# Altium PCB DC_5_3.3.PcbDoc
Units mil, origin at the board's own origin, x right, y up, seen from the top; angles counter-clockwise.
Board outline 6000 x 4000 mil, 2 copper layers (Top Layer, Bottom Layer); 27 components, 10 nets, 75 pads, 0 vias.
Unrouted connection lines stored in the file: 2.
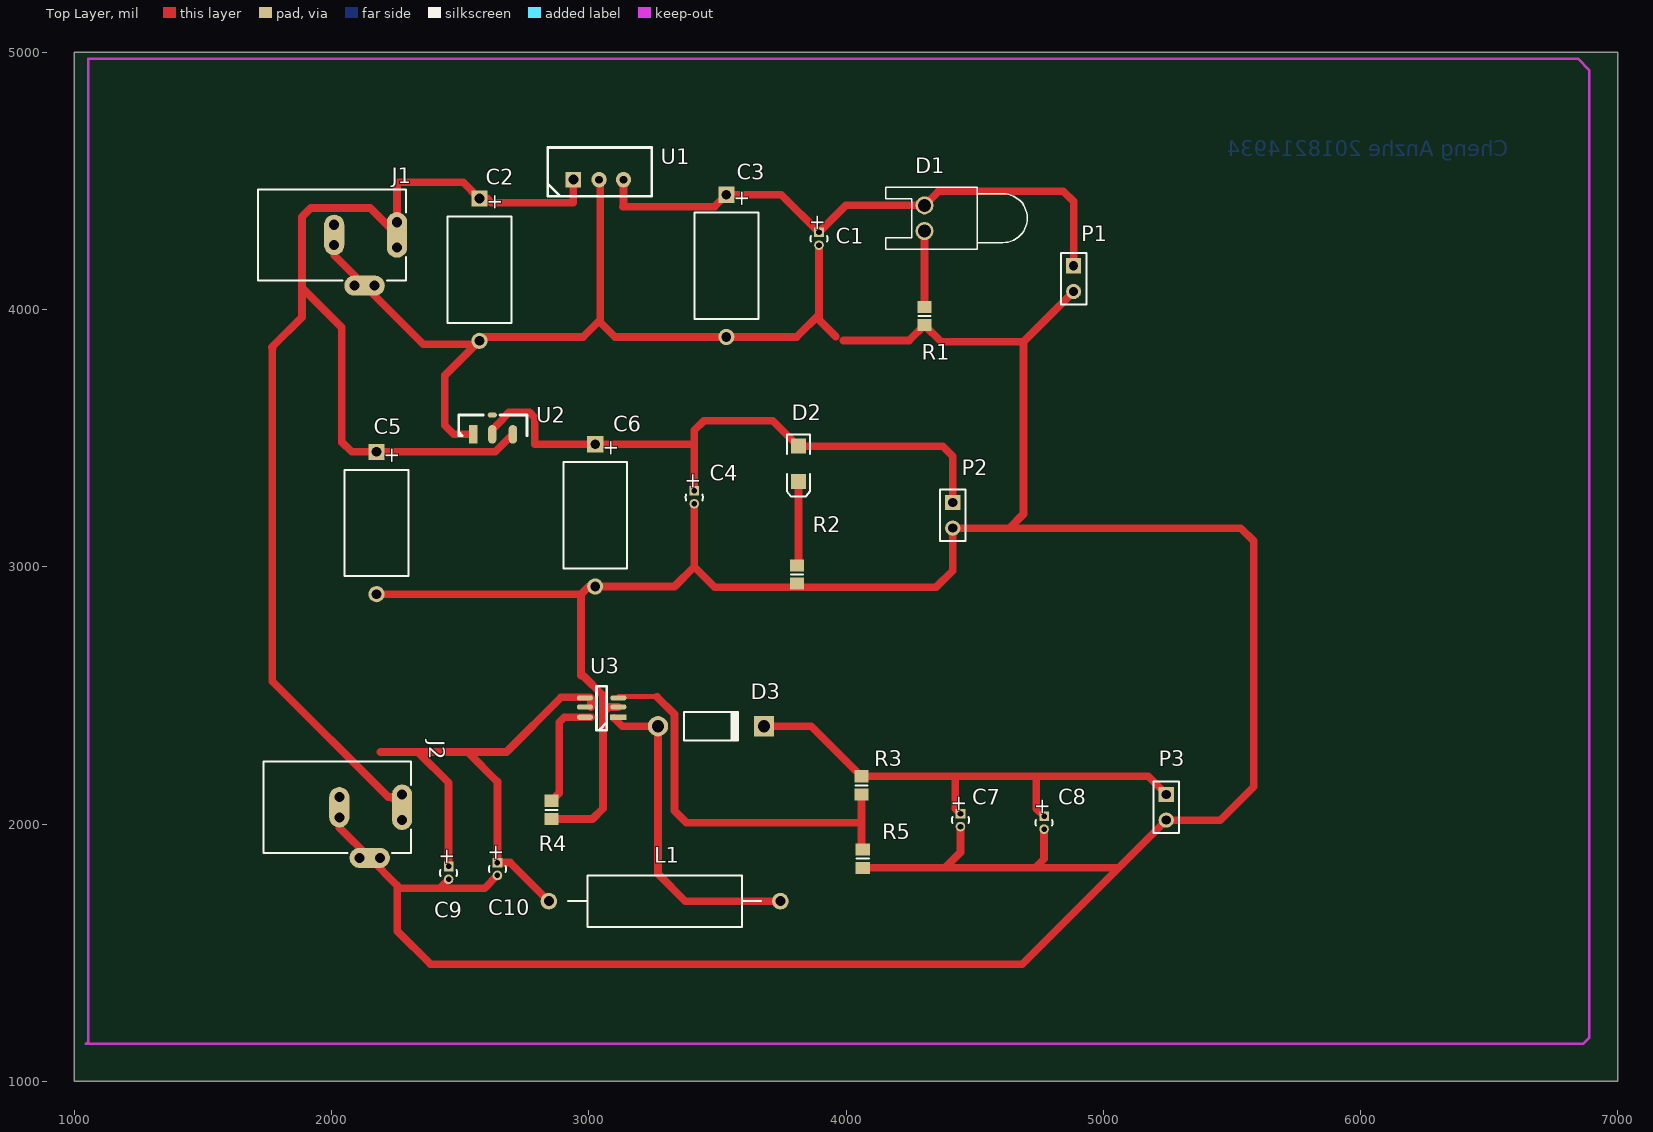
[diagram p0: Top Layer view]
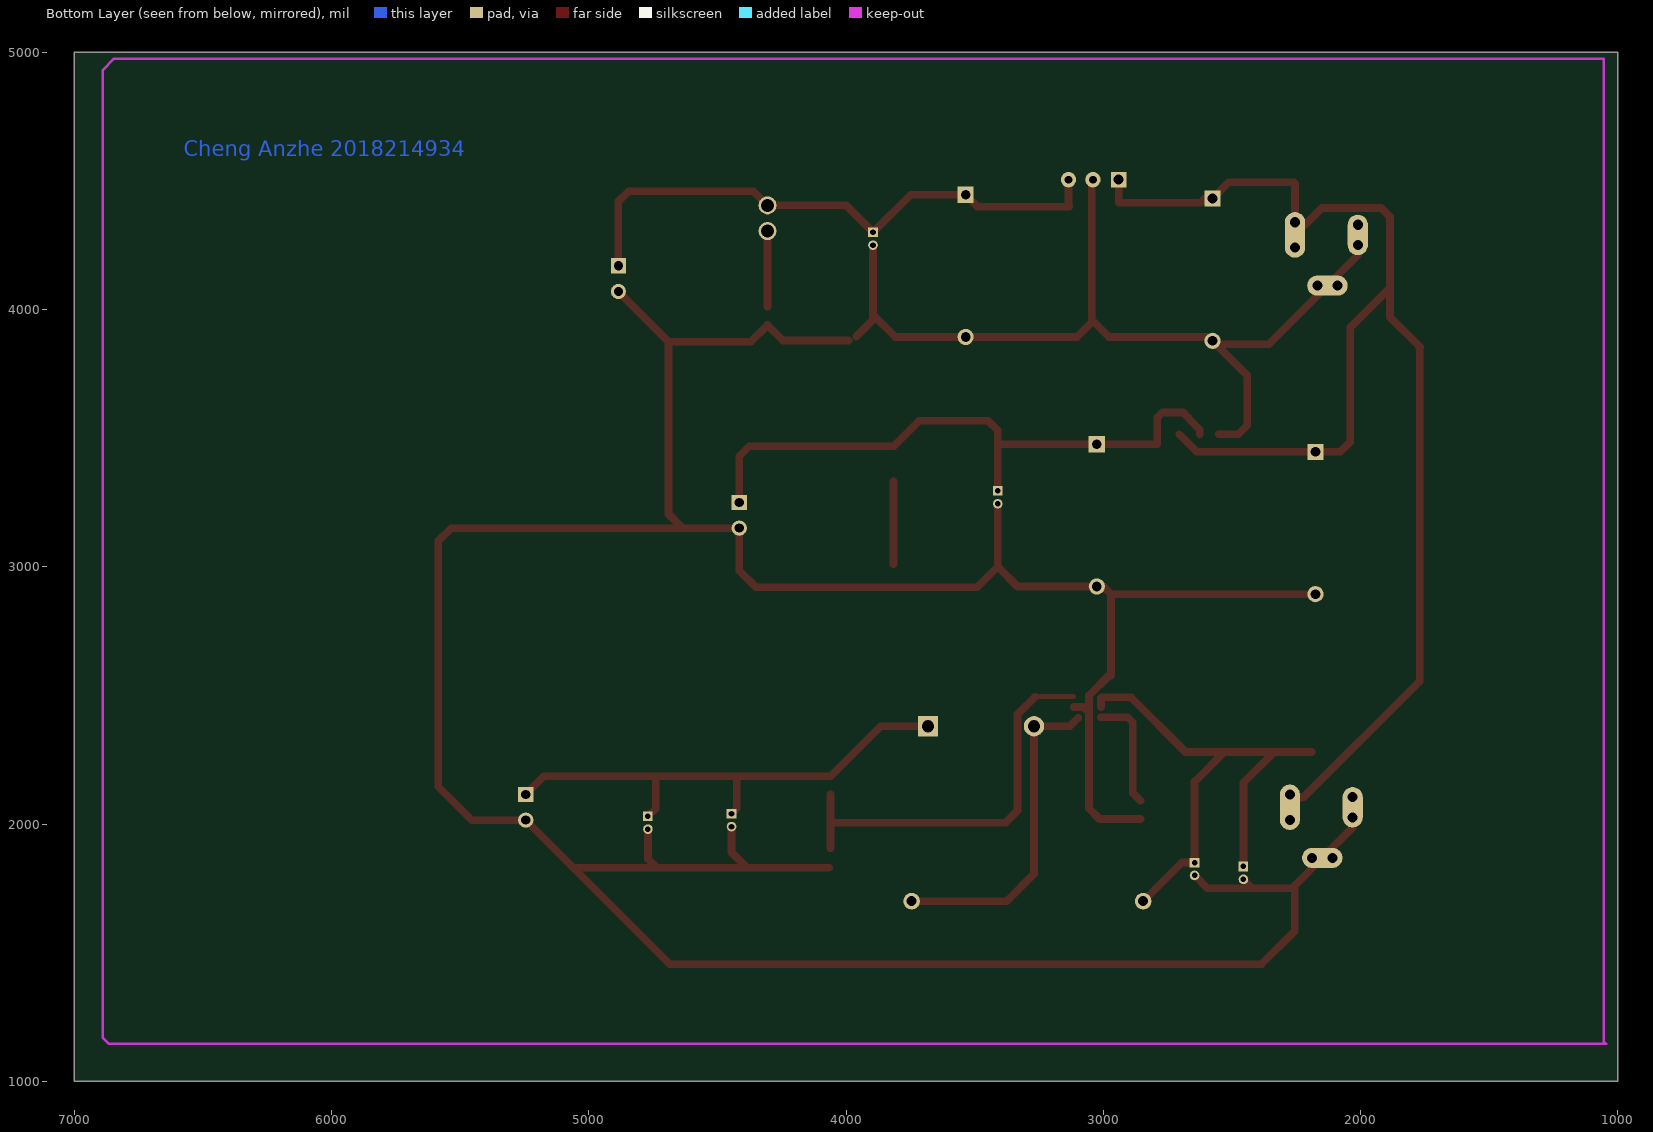
[diagram p1: Bottom Layer view, seen from below]

## Layer stack, top to bottom
Top Solder: solder mask 0.4, Solder Resist, Dk 3.5
Top Layer: signal copper 1.4
Dielectric 1: dielectric 12.6, FR-4, Dk 4.8
Bottom Layer: signal copper 1.4
Bottom Solder: solder mask 0.4, Solder Resist, Dk 3.5

## Board outline
1000,1000 7000,1000 7000,5000 1000,5000

## Design rules (kind name [scope] priority, off if disabled: settings)
Clearance [All] p1: gap=10
PolygonConnect [All] p1: connectstyle=Relief reliefconductorwidth=10 reliefentries=4 polygonreliefangle="90 Angle" airgapwidth=10
RoutingVias [All] p1: holewidth=28 width=50 viastyle="Through Hole" minholewidth=28 minwidth=50 maxholewidth=28 maxwidth=50
SolderMaskExpansion [All] p1: expansion=4
Width [All] p1: maxlimit=100 minlimit=10 preferedwidth=30
29 further rules are at their usual default settings.

## Components (designator, comment, footprint, x,y, rotation, side; value= is the part's Value field where it differs from the comment)
C1 "Comment" CAPPR1.27-1.7x2.8 3895,4275 r270 top
C2 "Comment" CAPPA14.05-10.5x6.3 2575,4155 r270 top
C3 "Comment" CAPPA14.05-10.5x6.3 3535,4170 r270 top
C4 "Cap Pol1" CAPPR1.27-1.7x2.8 3410,3270 r270 top
C5 "Cap Pol2" CAPPA14.05-10.5x6.3 2175,3170 r270 top
C6 "Cap Pol2" CAPPA14.05-10.5x6.3 3025,3200 r270 top
C7 "Cap Pol1" CAPPR1.27-1.7x2.8 4445,2015 r270 top
C8 "Cap Pol1" CAPPR1.27-1.7x2.8 4770,2005 r270 top
C9 "Cap Pol1" CAPPR1.27-1.7x2.8 2455,1810 r270 top
C10 "Cap Pol1" CAPPR1.27-1.7x2.8 2645,1825 r270 top
D1 "Comment" LED-0 4305,4355 r90 top
D2 "LED2" DSO-F2/D6.1 3815,3400 r270 top
D3 "Diode 11DQ03" DIO10.46-5.3x2.8 3475,2380 r0 top
J1 "Comment" KLD-0202 1715,4290 r0 top
J2 "PWR2.5" KLD-0202 1735,2065 r0 top
L1 "Inductor Iron" AXIAL-0.9 3295,1700 r0 top
P1 "Header 1" HDR1X2 4885,4170 r270 top
P2 "Header 3" HDR1X2 4415,3250 r270 top
P3 "Header 2" HDR1X2 5245,2115 r270 top
R1 "Comment" "RES 0805N (2012)" 4305,3975 r90 top
R2 "150Ω" "RES 0805N (2012)" 3810,2970 r90 top
R3 "88kΩ" "RES 0805N (2012)" 4060,2150 r90 top
R4 "1kΩ" "RES 0805N (2012)" 2855,2055 r90 top
R5 "12kΩ" "RES 0805N (2012)" 4065,1865 r90 top
U1 "MC7805CT" TO-220-3 3325,2715 r0 top
U2 "Comment" SOT-223 2545,3625 r0 top
U3 "FP6291" SOT23-6 3095,2415 r90 top

## Footprints (in the part's own frame and the unit in brackets; to place one, negate y for a bottom-side part, rotate by r counter-clockwise, add the part's x,y. Pads: shape width x height; smd on the part's side, far side on the other; paste and mask are expansions set on the pad)
AXIAL-0.9 [mm] "Axial Device, Thru-Hole; 2 Leads; 0.9 in Pin Spacing"
  round 1.65 hole 1: 1(-11.43,0) 2(11.43,0)
  silkscreen extent -9.53,-2.54 9.53,2.54
CAPPA14.05-10.5x6.3 [mm] "Capacitor, Axial, Polarised; Body 10.5 x 6.3 mm (LxDia. max), Lead Dia. 0.6 mm (typ)"
  rect 1.6x1.6 hole 0.95: 1(-7.025,0)
  round 1.6 hole 0.95: 2(7.025,0)
  silkscreen extent -5.25,-3.15 5.25,3.15
CAPPR1.27-1.7x2.8 [mm] "Capacitor, Radial, Tantalum; Body 1.7 x 2.8 mm (Dia.xH max); Pin Spacing 1.27 mm (typ)"
  rect 0.95x0.95 hole 0.55: 1(-0.635,0)
  round 0.95 hole 0.55: 2(0.635,0)
  silkscreen extent -0.29,-0.85 0.29,0.85
DIO10.46-5.3x2.8 [mm] "Diode, Axial; Body 5.2 x 2.7 mm (LxDia. max), Lead Dia. 0.86 mm (max)"
  round 2 hole 1.2: 1(-5.23,0)
  rect 2x2 hole 1.2: 2(5.23,0)
  silkscreen extent -2.65,-1.41 2.75,1.4
DSO-F2/D6.1 [mm] "SMT LED; 2 Flat Leads"
  rect 1.5x1.5 smd: 1(-1.75,0) 2(1.75,0)
  silkscreen extent -2.9,-1.15 3.2,1.15
HDR1X2 [mm] "Connector; Header; 2 Position"
  rect 1.5x1.5 hole 0.9: 1(0,0)
  round 1.5 hole 0.9: 2(2.54,0)
  silkscreen extent -1.27,-1.27 3.81,1.27
KLD-0202 [mm] "DC Power Jack, 2.5mm, KLD Series, PCB Mount"
  oval 2x4.5 all layers, no hole: 1(13.7,0)
  round 1.5 hole 1: 1A(13.7,-1.25) 1B(13.7,1.25) 2A(7.5,-1) 2B(7.5,1) 3A(9.5,-5) 3B(11.5,-5)
  oval 2x4 all layers, no hole: 2(7.5,0)
  oval 4x2 all layers, no hole: 3(10.5,-5)
  silkscreen extent 0,-4.5 14.6,4.5
LED-0 [mil] "Typical INFRARED GaAs LED; 2 Leads"
  round 70 hole 50: 1(50,0) 2(-50,0)
  silkscreen extent -120,-400 120,150
"RES 0805N (2012)" [mm] "Chip Resistor, Body 2.0x1.2mm, IPC Medium Density"
  rect 1.2x1.4 smd: 1(-0.9,0) 2(0.9,0)
  silkscreen extent 0,-0.6 0,0.6, body extent -1,-0.62 1,0.63, height 0.55
SOT23-6 [mm]
  rect 0.5x1.6 smd: 1(0,-0.508)
  oval 0.5x1.6 smd: 2(1.016,-0.508) 3(1.905,-0.508) 4(1.905,2.794) 5(1.016,2.794) 6(0,2.794)
  silkscreen extent -1.27,0.63 3.05,1.65
SOT-223 [mil]
  rect 33x72.36 smd: 1(5,-110)
  oval 33x72.36 smd: 2(80,-110) 3(160,-110)
  oval 35.83x19.68 smd: 4(80,-35)
  silkscreen extent -50,-116 215,-35
TO-220-3 [mil]
  rect 60x60 hole 39.37: 1(-385,1790)
  round 60 hole 30: 2(-285,1790) 3(-190,1790)
  silkscreen extent -485,1725 -80,1915

## Part data
C1: library part "Cap Pol1", "Polarized Capacitor (Radial)"
C2 C3: library part "Cap Pol2", "Polarized Capacitor (Axial)"
C4 C7 C8 C9 C10: "Polarized Capacitor (Radial)"
C5 C6: "Polarized Capacitor (Axial)"
D1: library part LED2, "Typical RED, GREEN, YELLOW, AMBER GaAs LED"
D2: "Typical RED, GREEN, YELLOW, AMBER GaAs LED"
D3: "Schottky Rectifier"
J1: library part PWR2.5, "Low Voltage Power Supply Connector"
J2: "Low Voltage Power Supply Connector"
L1: "Magnetic-Core Inductor"
P1 P2: library part "Header 2", "Header, 2-Pin"
P3: "Header, 2-Pin"
R1 R2 R3 R4 R5: library part Res2, "Resistor"
U2: library part AMS117-3.3, "AMS117-3.3"

## Nets (pads, with @x,y where several pads share a name; then routed paths per layer and width w, separated by ;. In a path a pad name is that pad's centre, name@x,y a point inside that pad or via, vN(x,y) a via of type N, cw(c..) or ccw(c..) an arc to the next point about the centre after c; other vN are vias at no path point)
GND: C1.2 C2.2 C3.2 C4.2 C5.2 C6.2 C7.2 C8.2 C9.2 C10.2 J1.2 J1.2A J1.2B J1.3 J1.3A J1.3B J2.2 J2.2A J2.2B J2.3 J2.3A J2.3B P1.2 P2.2 P3.2 R1.1 R2.1 R4.1 R5.1 U1.2 U2.1 U3.2 | length 17505.5
  Top Layer w10: C2.2@2561.57,3865 C2.2 C2.2@2590,3893.43 ; U1.2 U1.2@3045,4500
  Top Layer w30: J1.2 J1.2A 2010.28,4211.26 J1.3 2356.54,3865 2561.57,3865 2440,3743.43 2440,3550 2475,3515 U2.1 ; J2.2 J2.2A 2030.28,1986.26 J2.3 2255.91,1760.63 2255.91,1740 ; C5.2@2185,2893.43 2970,2893.43 ; C9.2 2420,1750 ; C2.2@2590,3893.43 2978.43,3893.43 3035,3950 3045,3950 ; C10.2 2595,1750 2420,1750 ; R4.1 3014.57,2019.57 3055,2060 3055,2432.01 ; U1.2@3045,4500 3045,3950 ; U3.2 3077.99,2455 3055,2432.01 ; C4.2 3410,3000 ; C1.2 3895,3980 ; 3960,3895 3895,3960 3895,3980 ; 3990,3880 4245.43,3880 R1.1 4369.57,3875 4690,3875 ; R5.1 4385,1829.57 ; C7.2 4445,1889.57 4385,1829.57 ; C8.2 4770,1864.57 4735,1829.57 ; P1.2 4690,3875 ; 2255.91,1740 2255.91,1584.09 2385,1455 4685,1455 5059.57,1829.57 ; 2255.91,1740 2265.91,1750 2420,1750 ; 2970,2893.43 3000,2923.43 C6.2 3333.43,2923.43 3410,3000 ; 2970,2893.43 2970,2577.4 2977.6,2577.4 3055,2500 3055,2432.01 ; 3045,3950 3101.57,3893.43 C3.2 3808.43,3893.43 3895,3980 ; 3410,3000 3490,2920 4350,2920 4415,2985 P2.2 4635,3150 ; 4385,1829.57 4735,1829.57 ; 4635,3150 5535,3150 5585,3100 5585,2145 5455,2015 P3.2 5059.57,1829.57 ; 4635,3150 4690,3205 4690,3875 ; 4735,1829.57 5059.57,1829.57
NetC1_1: C1.1 C3.1 D1.1 P1.1 U1.3 | length 2260.8
  Top Layer w30: 3131.57,4400 3490,4400 ; 3135,4405 U1.3 ; 3493.43,4405 C3.1 3748.43,4446.57 C1.1 4000,4405 D1.1 4360,4460 4845,4460 4885,4420 P1.1
NetC4_1: C4.1 C6.1 D2.1 P2.1 U2.2 | length 2425.1
  Top Layer w30: U2.2 2625,3532.65 2667.91,3575.57 2667.91,3577.91 2690,3600 2770,3600 2790,3580 2790,3476.57 C6.1 3398.43,3476.57 ; C4.1 3410,3530 3448.15,3568.15 3715.75,3568.15 D2.1 4376.1,3468.9 4415,3430 P2.1
NetC7_1: C7.1 C8.1 D3.2 P3.1 R3.2 | length 1995.4
  Top Layer w30: D3.2 3865.43,2380 R3.2 4425,2185.43 ; C7.1 4425,2060 4425,2185.43 ; C8.1 4740,2060 4740,2185.43 ; P3.1 5174.57,2185.43 4740,2185.43 ; 4425,2185.43 4740,2185.43
NetD1_2: D1.2 R1.2 | length 294.6
  Top Layer w30: R1.2 D1.2
NetD2_2: D2.2 R2.2 | length 320.7
  Top Layer w30: R2.2@3815,3010.43 D2.2
NetD3_1: D3.1 L1.2 U3.1 | length 1278.9
  Top Layer w30: U3.1@3097.51,2412.49 3130,2380 D3.1 3269.09,1805.91 3375,1700 L1.2
NetR3_1: R3.1 R5.2 U3.3 | length 1576.8
  Top Layer w20: U3.3@3115,2495 3265,2495
  Top Layer w30: 3265,2495 3333.46,2426.54 3333.46,2051.54 3380,2005 4060,2005 ; R5.2@4060,1905.43 4060,2005 ; R3.1 4060,2005
NetR4_2: R4.2 U3.6 | length 448.7
  Top Layer w30: R4.2 2885,2120.43 2885,2395 2905,2415 U3.6@3008.39,2415
VCC: C2.1 C5.1 C9.1 C10.1 J1.1 J1.1A J1.1B J2.1 J2.1A J2.1B L1.1 U1.1 U2.3 U3.4 U3.5 | length 7557.6
  Top Layer w10: 1768.29,3853.29 1780,3841.57 ; C2.1 C2.1@2605,4431.57
  Top Layer w30: 1768.29,3853.29 1885,3970 1885,4085 2040,3930 2040,3485 2078.43,3446.57 C5.1 2636.57,3446.57 U2.3 ; 1770.79,3850.79 1770,3850 1770,2555 2220,2105 2234.37,2105 J2.1 ; 1885,4090 1885,4360 1920,4395 2149.37,4395 J1.1 J1.1B 2254.37,4489.37 2259.37,4494.37 2512.2,4494.37 C2.1 ; 2190,2280 2335,2280 ; C9.1 2455,2160 2335,2280 ; C2.1@2605,4431.57 2621.57,4415 2940,4415 U1.1 ; L1.1 2695,1850 C10.1 2645,2165 2530,2280 ; U3.5@3008.39,2455 3008.39,2489.8 3005.79,2492.4 2892.4,2492.4 2680,2280 2530,2280 ; 2335,2280 2530,2280
pads on no net: U2.4

## Keep-outs
Keep-Out Layer:
  lines w10: 1045,1145 1055,1155 1055,4975 6845,4975 6890,4930 6890,1170 6865,1145 1045,1145

## Other copper
Bottom Layer:
  text "Cheng Anzhe 2018214934" at 6575,4595 h60

## Text inside footprints (layer, text, board x,y; h text height)
C1: Top Overlay "+" at 3865.47,4372.83 h59.06 r270
C2: Top Overlay "+" at 2611.42,4451.26 h59.06 r270
C3: Top Overlay "+" at 3571.42,4466.26 h59.06 r270
C4: Top Overlay "+" at 3380.47,3367.83 h59.06 r270
C5: Top Overlay "+" at 2211.42,3466.26 h59.06 r270
C6: Top Overlay "+" at 3061.42,3496.26 h59.06 r270
C7: Top Overlay "+" at 4415.47,2112.83 h59.06 r270
C8: Top Overlay "+" at 4740.47,2102.83 h59.06 r270
C9: Top Overlay "+" at 2425.47,1907.83 h59.06 r270
C10: Top Overlay "+" at 2615.47,1922.83 h59.06 r270
J1: Mechanical 1 "Mech 2 - Clearance, move to internal plane if present" at 1726.26,4489.44 h11.81; Mechanical 1 "Mech 1 - Slot cut-out" at 1726.26,4509.13 h11.81; Mechanical 1 "Assign keep-out area to slot" at 1726.26,4548.5 h11.81; Mechanical 1 "Alert PCB fab to slot details" at 1726.26,4528.81 h11.81
J2: Mechanical 1 "Mech 2 - Clearance, move to internal plane if present" at 1746.26,2264.44 h11.81; Mechanical 1 "Mech 1 - Slot cut-out" at 1746.26,2284.13 h11.81; Mechanical 1 "Assign keep-out area to slot" at 1746.26,2323.5 h11.81; Mechanical 1 "Alert PCB fab to slot details" at 1746.26,2303.82 h11.81